# Altium PCB 6678_double_vpx.PcbDoc (part 1 of 3)
Units mil, origin at the board's own origin, x right, y up, seen from the top; angles counter-clockwise.
Board outline 6299.21 x 3937.01 mil, 6 copper layers (TOP, GND02, S03, S04, GND05, BOTTOM), stack 32.112 mil thick; 42 components, 156 nets, 734 pads, 1033 vias.
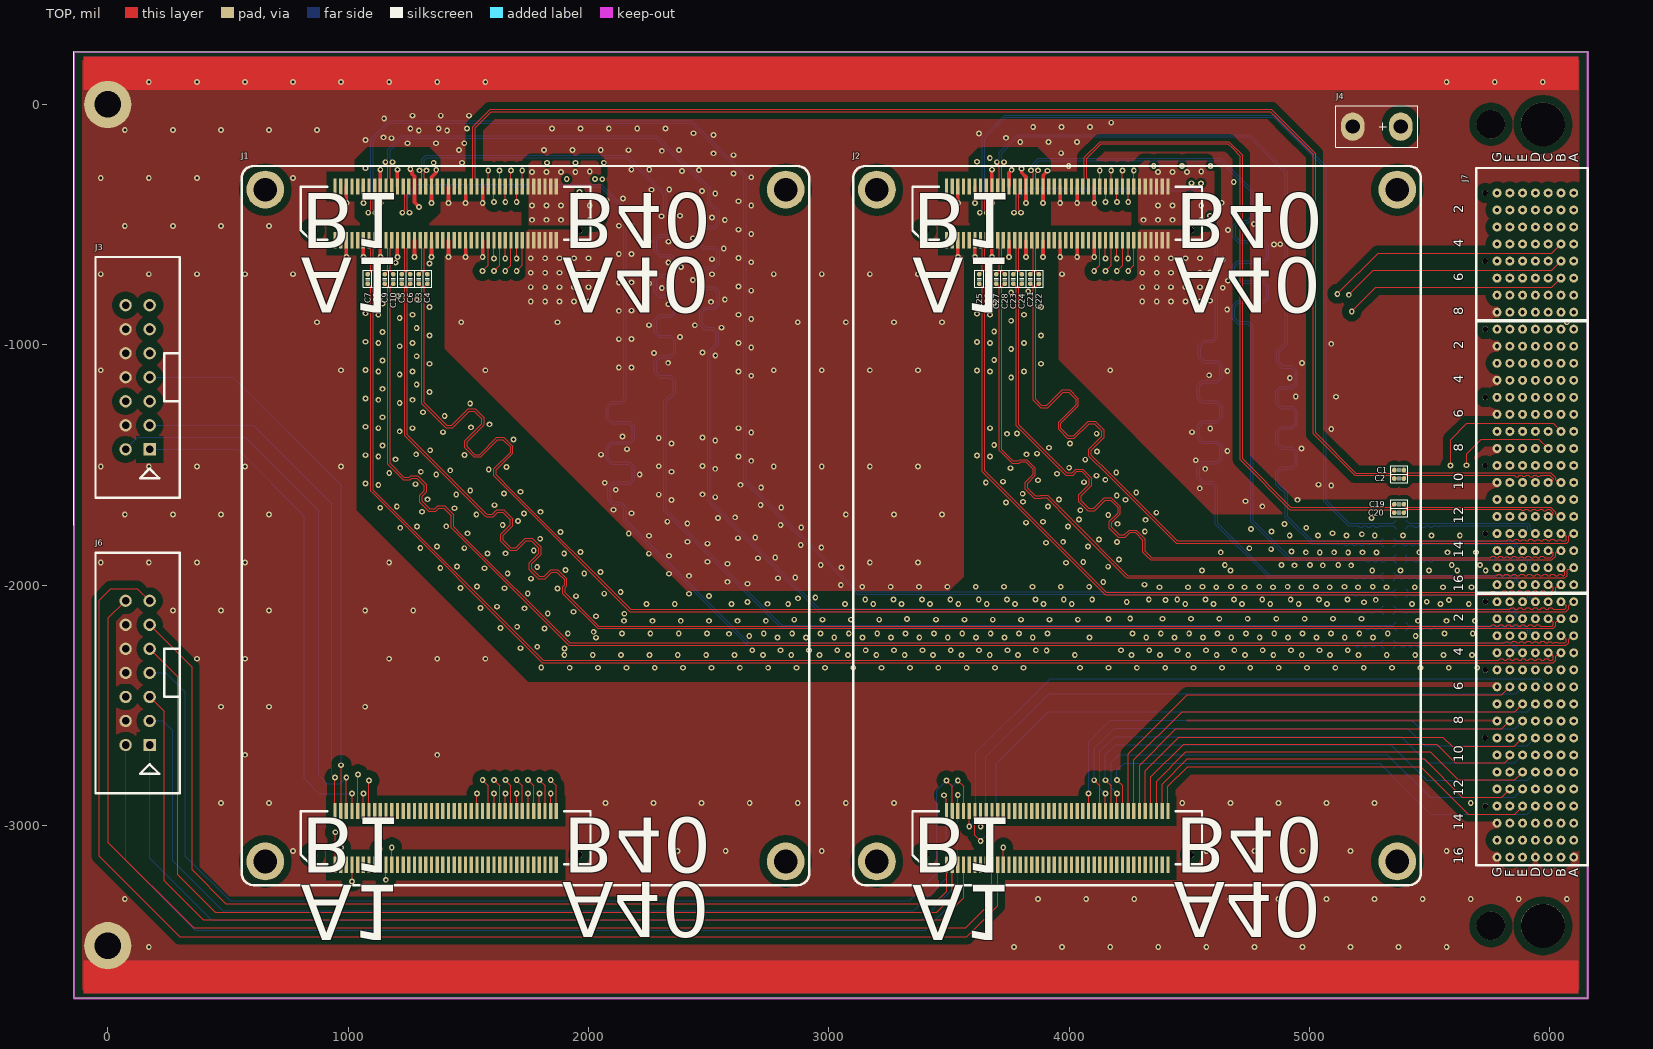
[diagram p0: TOP view]
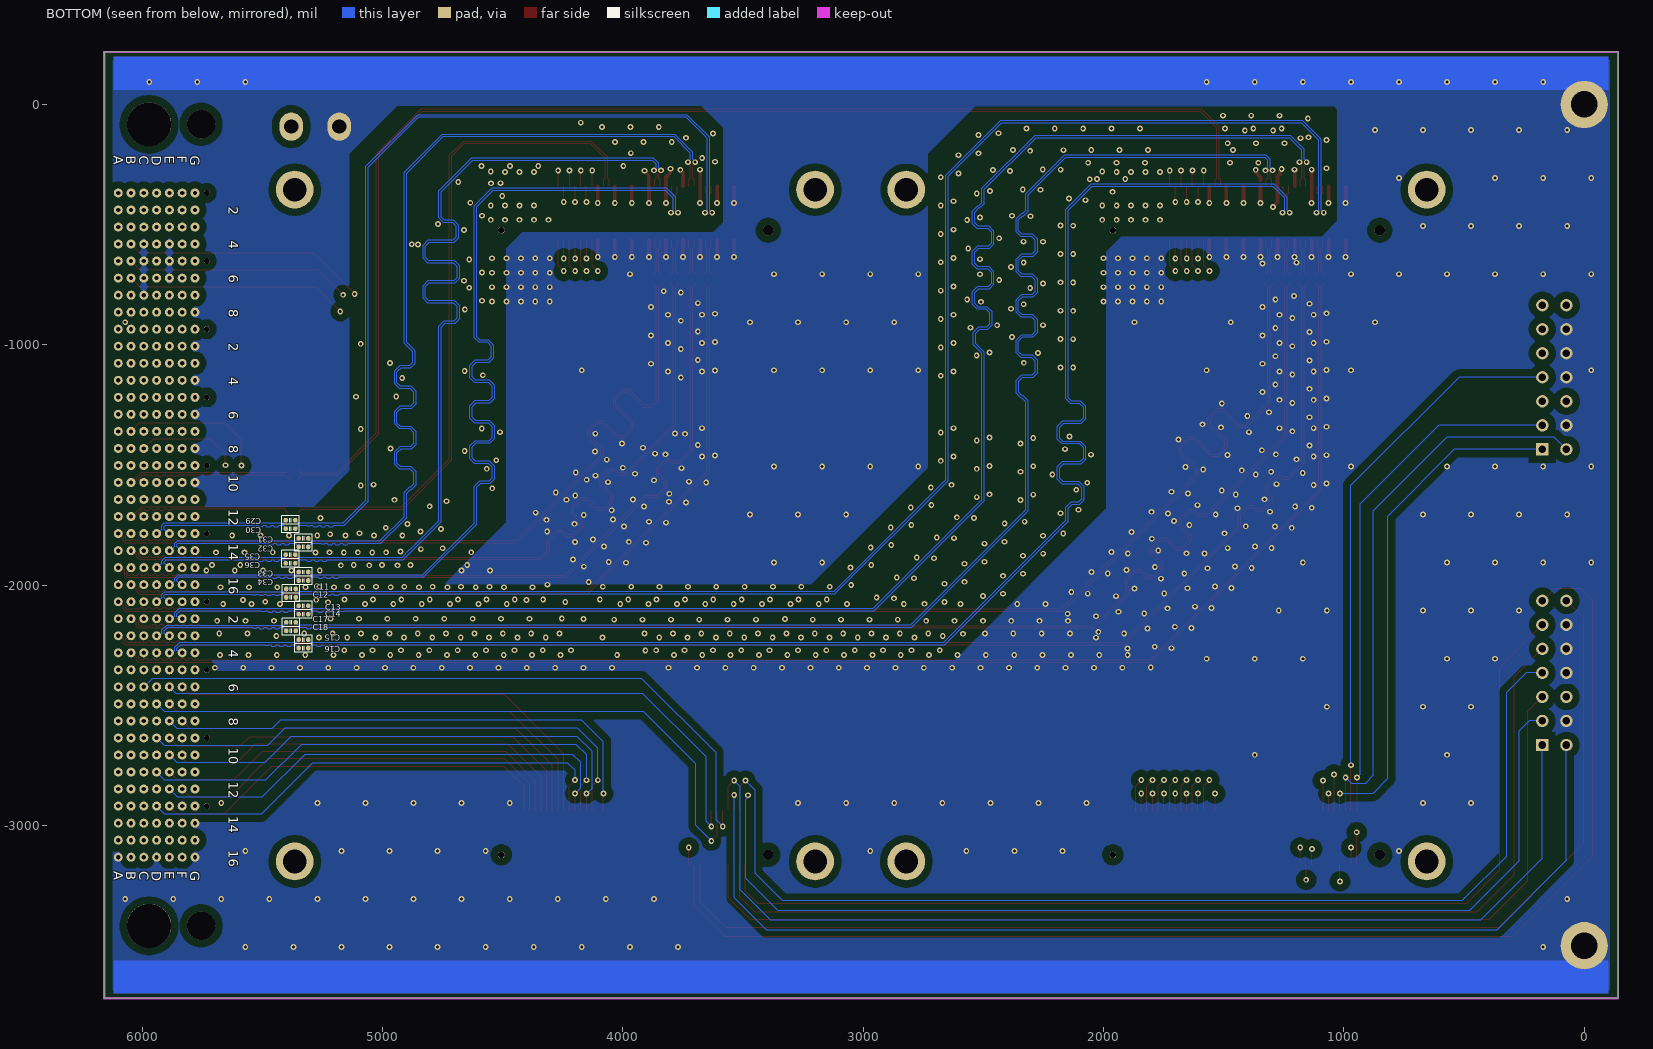
[diagram p1: BOTTOM view, seen from below]
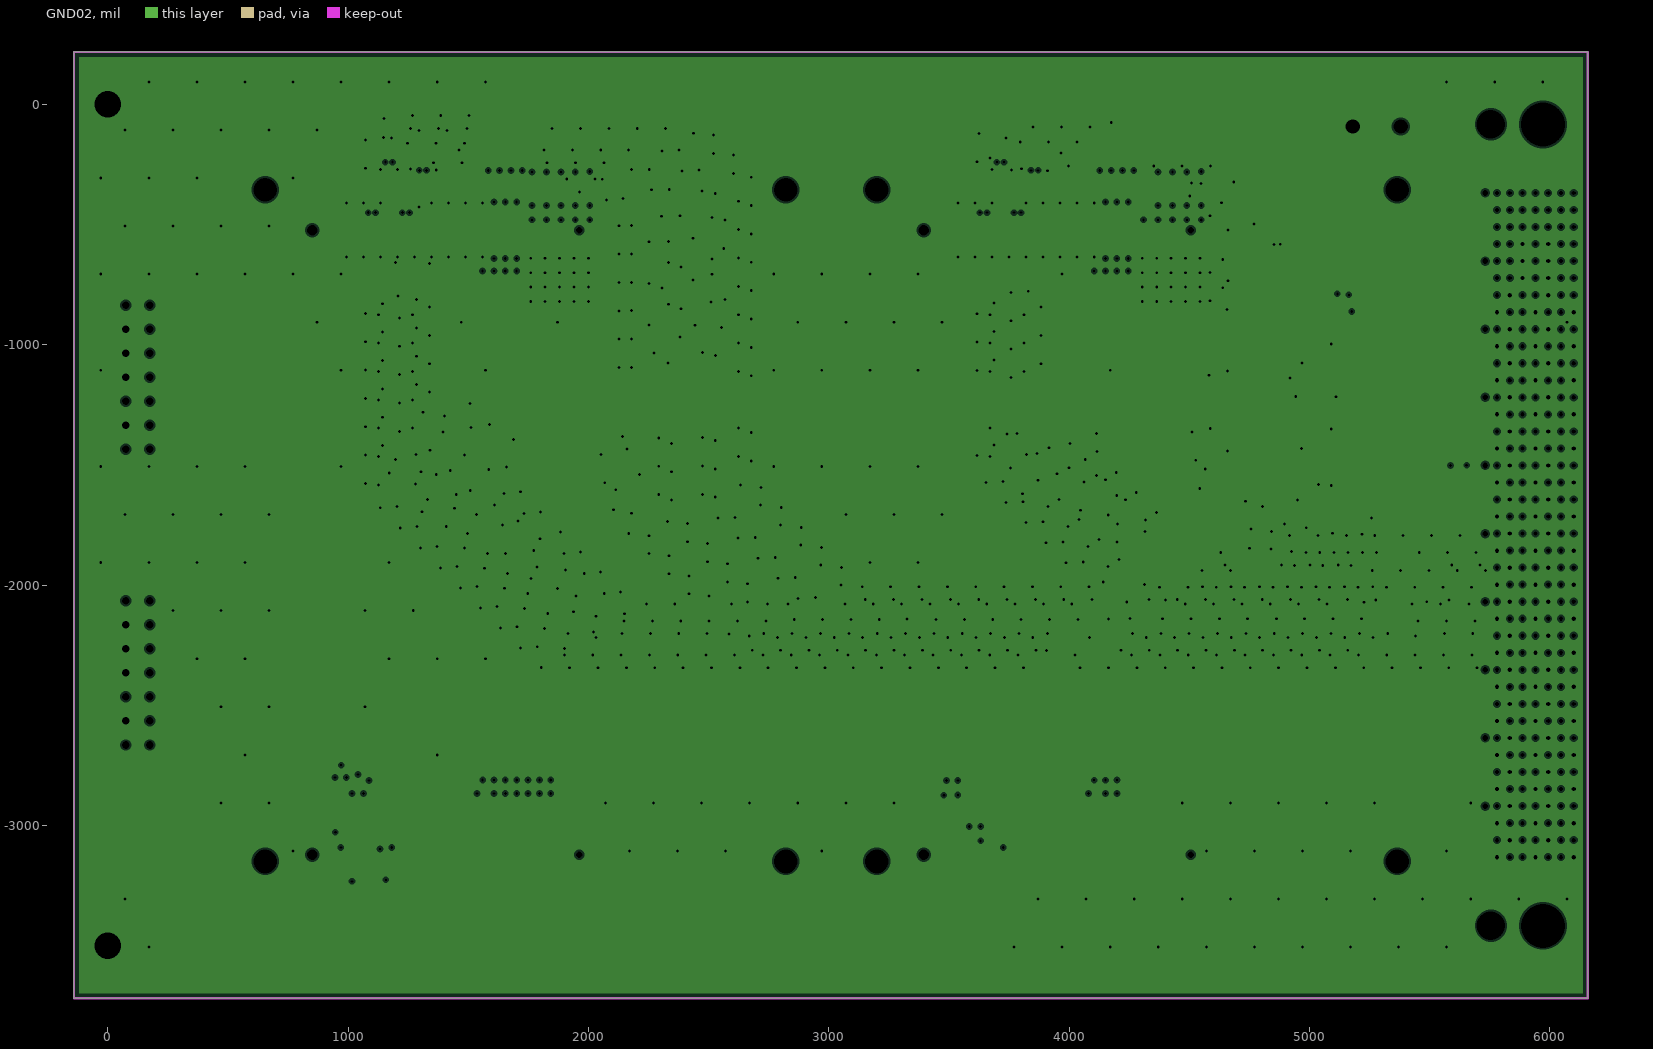
[diagram p2: GND02, clearances drawn from the general rule]
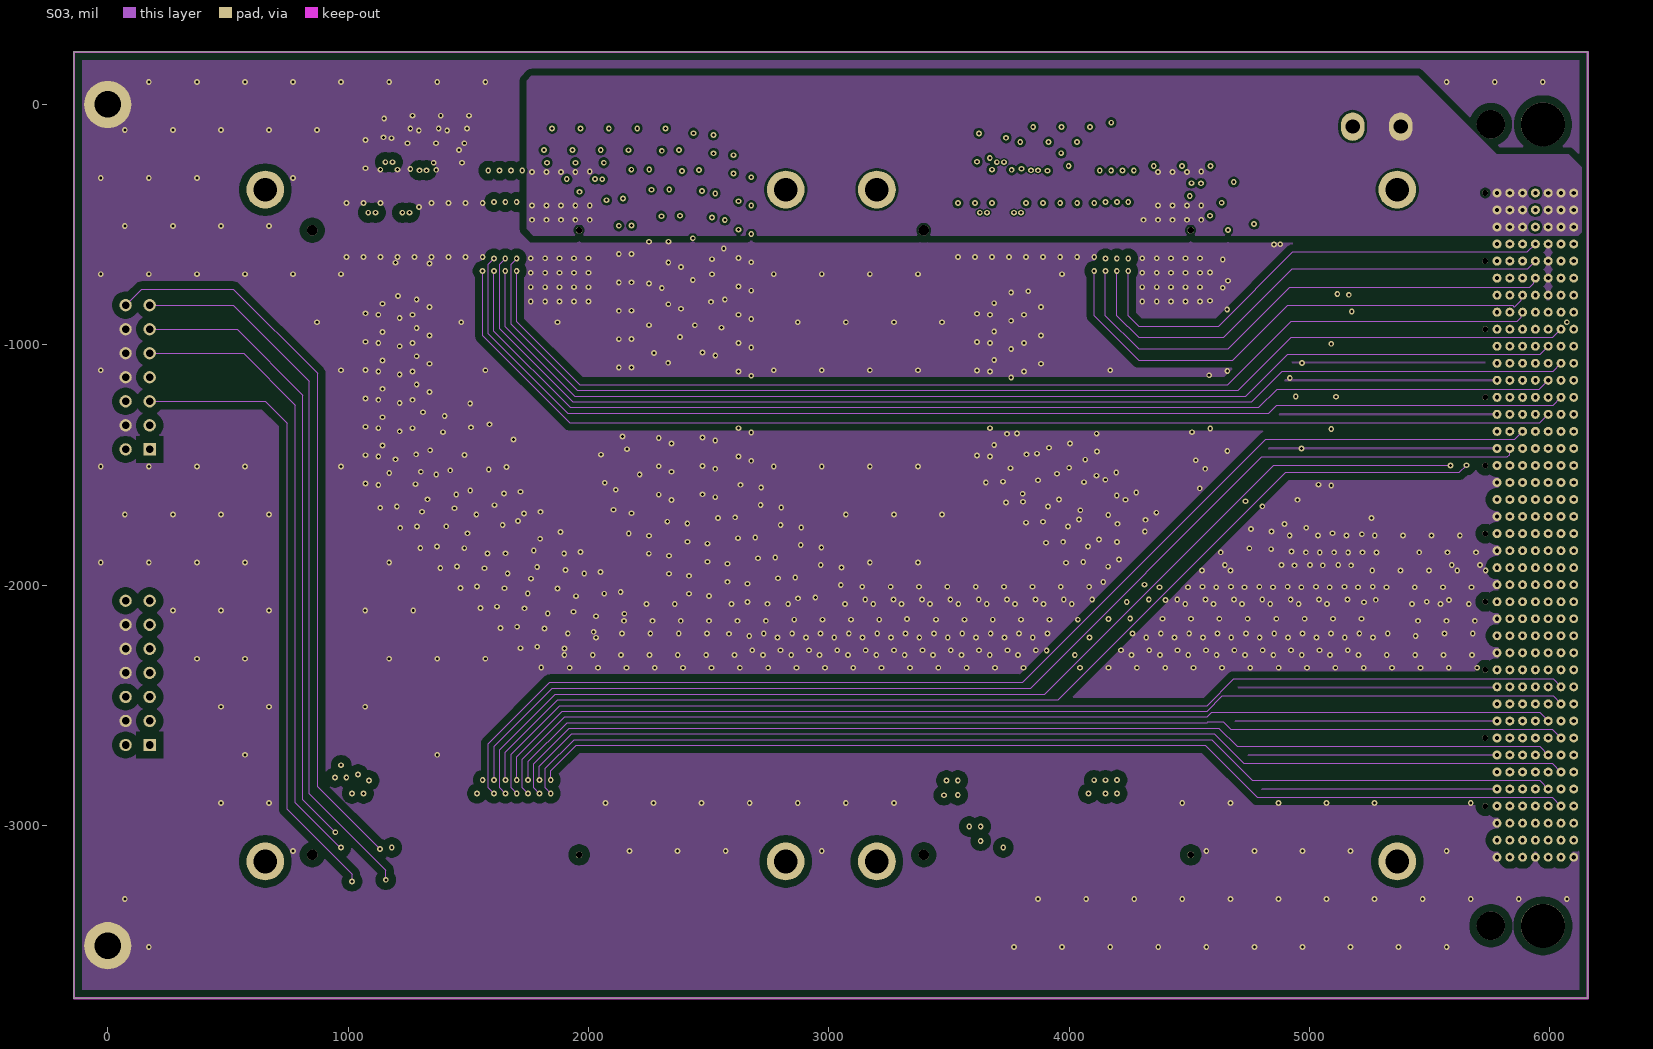
[diagram p3: S03]
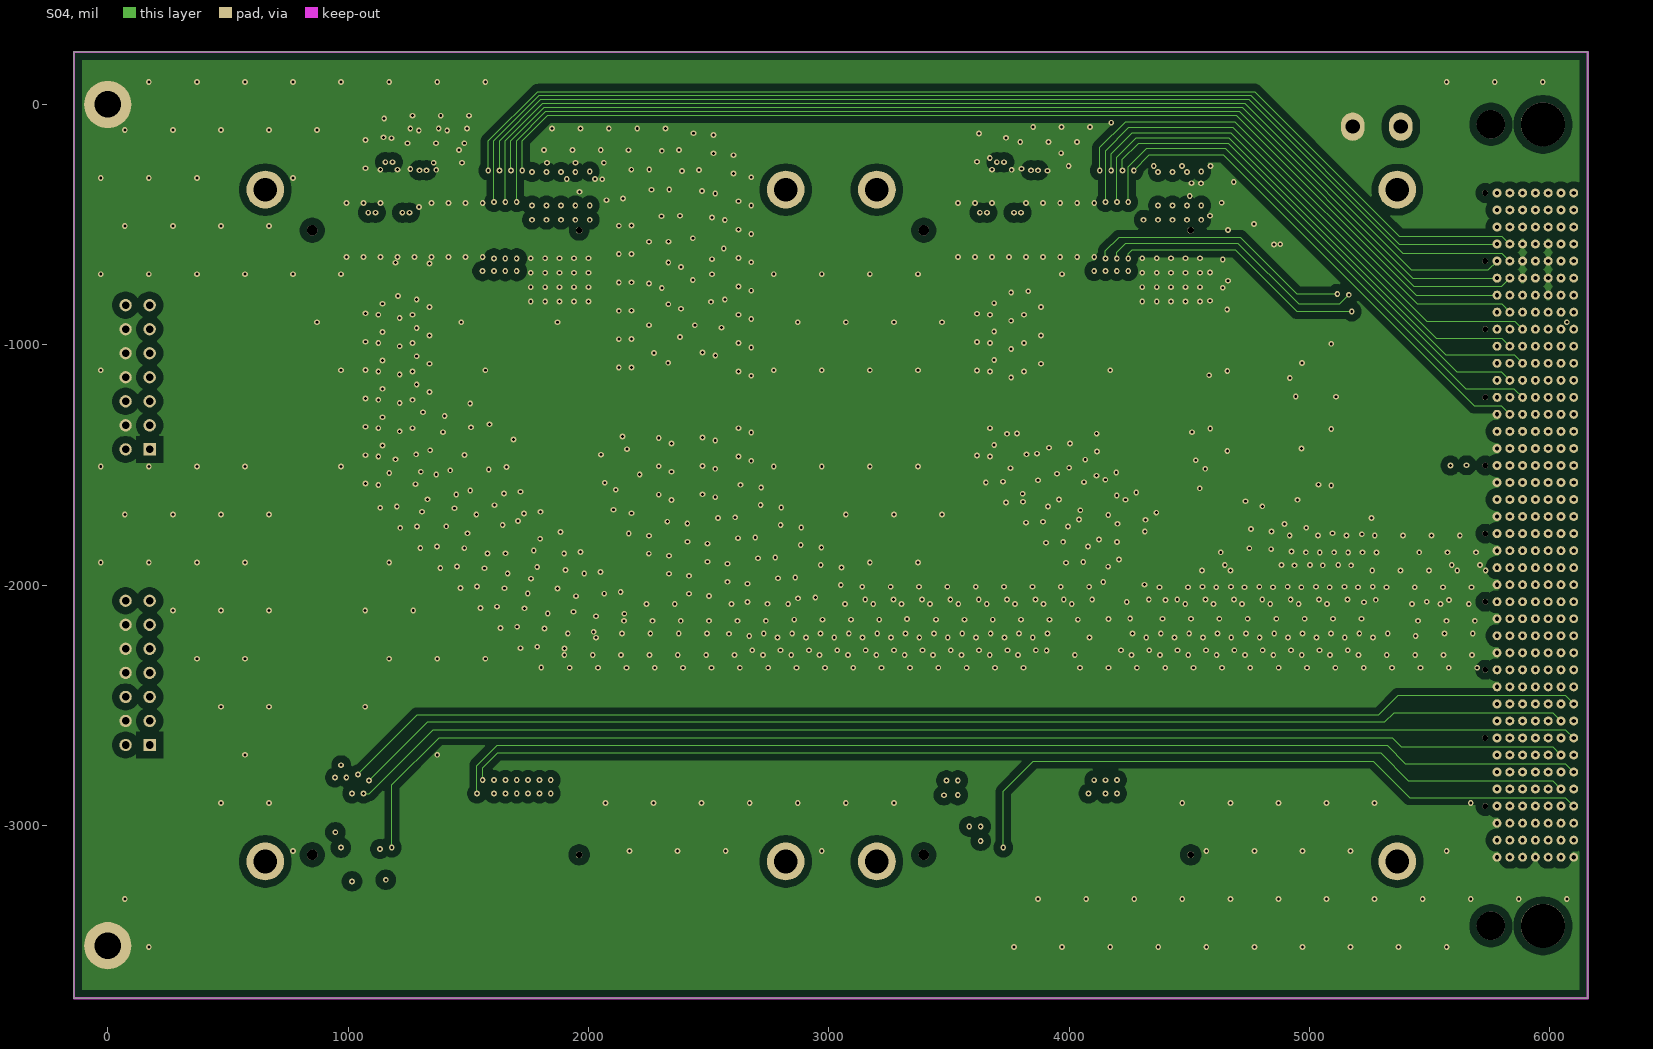
[diagram p4: S04]
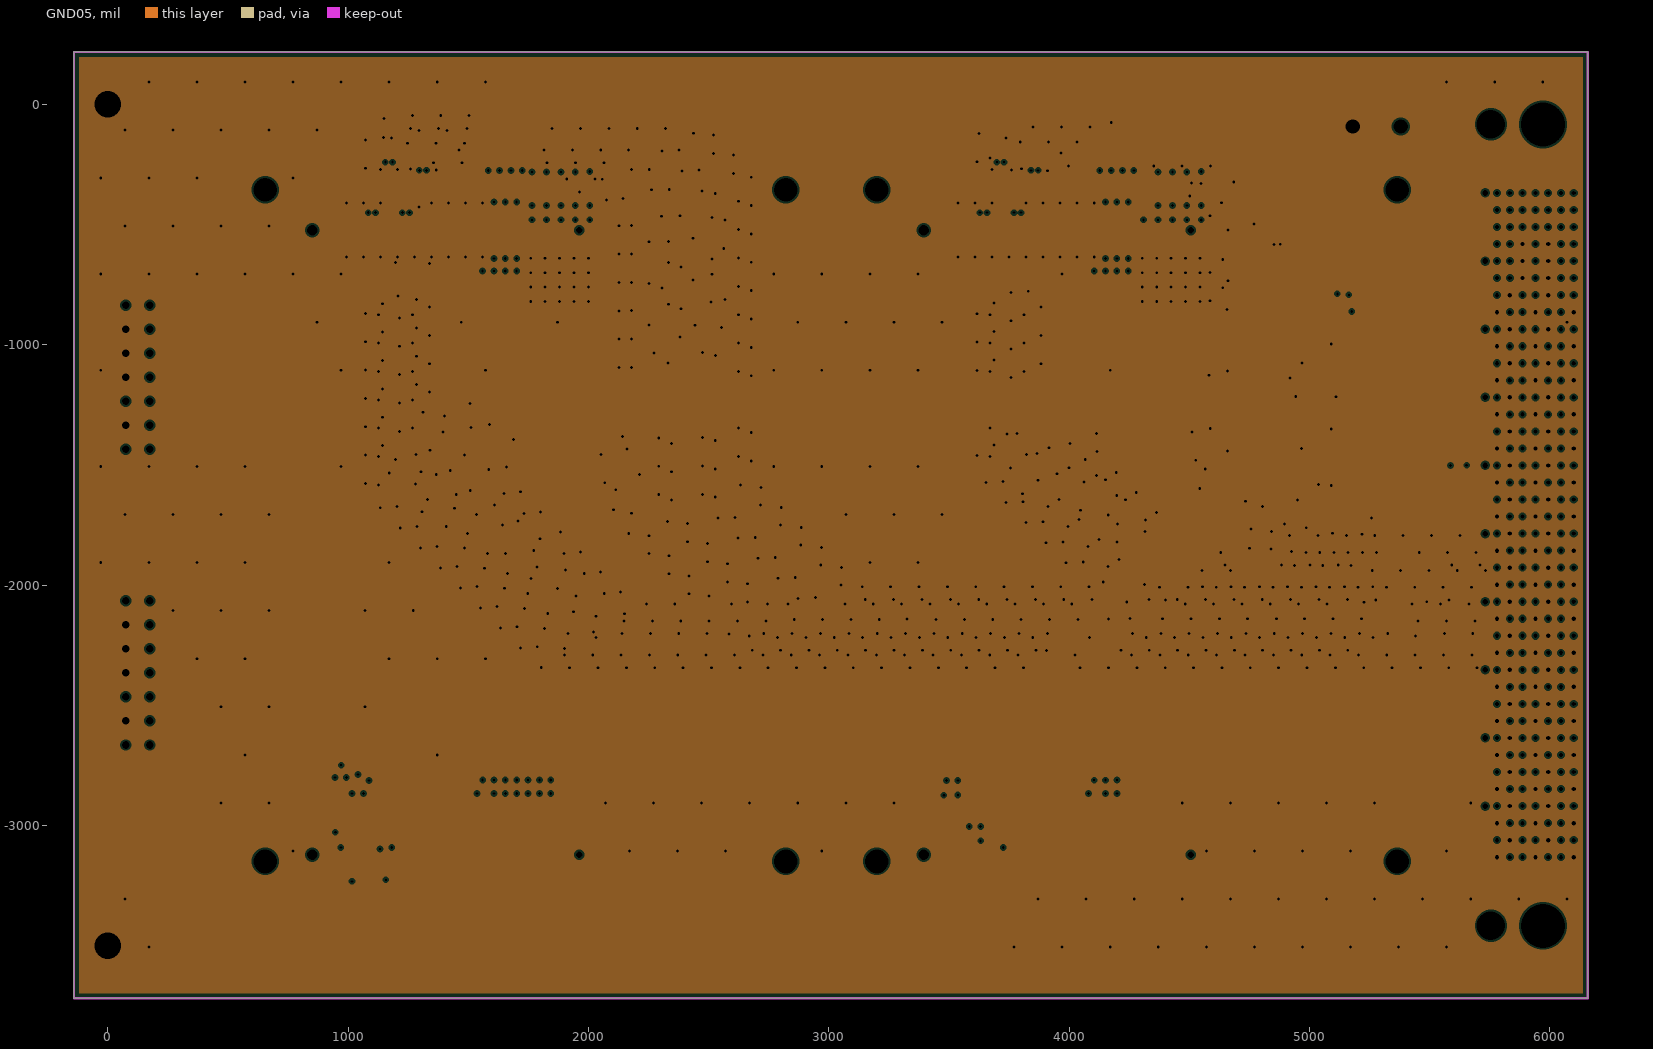
[diagram p5: GND05, clearances drawn from the general rule]

## Layer stack, top to bottom
Top Solder: solder mask 0.4, Solder Resist, Dk 3.5
TOP: signal copper 1.4
Dielectric 2: prepreg 2.8, PP-006, Dk 4.1
GND02: plane copper 1.378, net GND
Dielectric 4: prepreg 2.8, PP-006, Dk 4.1
S03: signal copper 1.378
Dielectric 1: dielectric 12.6, FR-4, Dk 4.8
S04: signal copper 1.378
Dielectric 5: prepreg 2.8, PP-006, Dk 4.1
GND05: plane copper 1.378, net GND
Dielectric 3: prepreg 2.8, PP-006, Dk 4.1
BOTTOM: signal copper 1.4
Bottom Solder: solder mask 0.4, Solder Resist, Dk 3.5

## Board outline
-140.56,-3718.5 6158.65,-3718.5 6158.65,218.5 -140.56,218.5

## Design rules (kind name [scope] priority, off if disabled: settings)
Clearance Clearance_GND [InNamedPolygon('GND_L')] p1: gap=30 ignorepadtopadclearanceinfootprint=TRUE
Clearance Clearance_room4 [WithinRoom('Room4') or WithinRoom('Room5')  or WithinRoom('DDR3')] p2: gap=3.9 ignorepadtopadclearanceinfootprint=TRUE
Clearance [WithinRoom('Room1')or WithinRoom('Room2')or WithinRoom('Room3') OR WithinRoom('Room6')] p3: gap=4 ignorepadtopadclearanceinfootprint=TRUE except(0: Arc-Hole Track-Hole SMDPad-Hole THPad-Hole Via-Hole Fill-Hole Poly-Hole Region-Hole Text-Hole)
Clearance Clearance_1 [InDifferentialPairClass('CF')] p4: gap=5 ignorepadtopadclearanceinfootprint=FALSE except(0: Arc-Hole Track-Hole SMDPad-Hole THPad-Hole Via-Hole Fill-Hole Poly-Hole Region-Hole Text-Hole; 6: Via-Via; 12: Arc-Fill Arc-Poly Arc-Region Track-Fill Track-Poly Track-Region SMDPad-Fill SMDPad-Poly SMDPad-Region)
Clearance Clearance_ALL [All] p5: gap=7 ignorepadtopadclearanceinfootprint=TRUE except(5: SMDPad-Fill SMDPad-Poly SMDPad-Region; 10: Arc-Hole Track-Hole SMDPad-Hole THPad-Fill THPad-Poly THPad-Region THPad-Hole Via-Fill Via-Poly Via-Region Via-Hole Fill-Fill Fill-Poly Fill-Region Fill-Hole Poly-Poly Poly-Region Poly-Hole Region-Region Region-Hole Text-Hole; 12: Arc-Fill Arc-Poly Arc-Region Track-Fill Track-Poly Track-Region)
ComponentClearance [All] p1: gap=0 collisioncheckmode=3 verticalgap=0 showdistances=FALSE
DiffPairsRouting [InDifferentialPairClass('CF')] p1: maxlimit=6 minlimit=6 mostfreqgap=6 toplayer_minwidth=4 toplayer_maxwidth=4 toplayer_prefwidth=4 midlayer1_minwidth=4 midlayer1_maxwidth=4 midlayer1_prefwidth=4 midlayer2_minwidth=4 midlayer2_maxwidth=4 midlayer2_prefwidth=4 bottomlayer_minwidth=4 bottomlayer_maxwidth=4 bottomlayer_prefwidth=4 maxuncoupledlength=1500
FanoutControl [InComponent('GP1') OR InComponent('J9')] p1: bgadir=Out bgaviamode=Centered fanoutstyle=BGA fanoutdirection=Alternating viagrid=1
FanoutControl Fanout_BGA [InComponent('U1')] p2: bgadir=Out bgaviamode=Centered fanoutstyle=BGA fanoutdirection=Alternating viagrid=1 // Fanout_BGA (Default Rule)
FanoutControl Fanout_LCC [IsLCC] p3: bgadir=Out bgaviamode=Centered fanoutstyle=Auto fanoutdirection=Alternating viagrid=1 // Fanout_LCC (Default Rule)
FanoutControl Fanout_SOIC [IsSOIC] p4: bgadir=Out bgaviamode=Centered fanoutstyle=Auto fanoutdirection=Alternating viagrid=1 // Fanout_SOIC (Default Rule)
FanoutControl Fanout_Small [(CompPinCount < 5)] p5: bgadir=Out bgaviamode=Centered fanoutstyle=Auto fanoutdirection=OutThenIn viagrid=1 // Fanout_Small (Default Rule)
FanoutControl Fanout_Default [All] p6: bgadir=Out bgaviamode=Centered fanoutstyle=Auto fanoutdirection=Alternating viagrid=1 // Fanout_Default (Default Rule)
HoleSize [All] p1: absolutevalues=TRUE maxlimit=1000 minlimit=1 maxpercent=80.000 minpercent=20.000
MatchedLengths DSP0_SRIO_RX [InNetClass('DSP0_SRIO_RX')] p1: tolerance=5 checknetsindiffpair=TRUE checkdiffpairvsdiffpair=FALSE checkxsignals=FALSE checkothers=FALSE
MatchedLengths DSP1_SRIO_RX [InNetClass('DSP1_SRIO_RX')] p2: tolerance=5 checknetsindiffpair=TRUE checkdiffpairvsdiffpair=FALSE checkxsignals=FALSE checkothers=FALSE
MatchedLengths BANK109_RX [InNetClass('F4_BANK109_RX')] p3: tolerance=5 checknetsindiffpair=TRUE checkdiffpairvsdiffpair=FALSE checkxsignals=FALSE checkothers=FALSE
MatchedLengths BANK110_RX [InNetClass('F4_BANK110_RX')] p4: tolerance=5 checknetsindiffpair=TRUE checkdiffpairvsdiffpair=FALSE checkxsignals=FALSE checkothers=FALSE
MatchedLengths BANK109_TX [InNetClass('F4_BANK109_TX')] p5: tolerance=5 checknetsindiffpair=TRUE checkdiffpairvsdiffpair=FALSE checkxsignals=FALSE checkothers=FALSE
MatchedLengths BANK110_TX [InNetClass('F4_BANK110_TX')] p6: tolerance=5 checknetsindiffpair=TRUE checkdiffpairvsdiffpair=FALSE checkxsignals=FALSE checkothers=FALSE
MatchedLengths CFD [InNetClass('CFD')] p7: tolerance=5 checknetsindiffpair=TRUE checkdiffpairvsdiffpair=FALSE checkxsignals=FALSE checkothers=FALSE
PlaneClearance [isvia] p1: clearance=8
PlaneClearance PlaneClearance_1 [All] p2: clearance=8
PlaneConnect [IsVia] p1: planeconnectstyle=Direct reliefexpansion=20 reliefentries=4 reliefconductorwidth=10 reliefairgap=10
PlaneConnect PlaneConnect_1 [All] p2: planeconnectstyle=Direct reliefexpansion=6 reliefentries=4 reliefconductorwidth=10 reliefairgap=8
PolygonConnect [All] p1: connectstyle=Direct reliefconductorwidth=15 reliefentries=4 polygonreliefangle="90 Angle" airgapwidth=10
RoutingCorners [All] p1: cornerstyle=45-Degree minsetback=0 maxsetback=100
RoutingTopology RoutingTopology_DDRAddressAndControls_2 [InNetClass('DDR_AddressAndControls_2')] p1: topology=Daisy_Simple
RoutingTopology RoutingTopology_DDRAddressAndControls_1 [InNetClass('DDR_AddressAndControls_1')] p2: topology=Daisy_Simple
RoutingTopology RoutingTopology_DDRAddressAndControls [InNetClass('DDR_AddressAndControls')] p3: topology=Daisy_Simple
RoutingTopology [All] p4: topology=Shortest
RoutingVias [All] p1: holewidth=12 width=24 viastyle="Through Hole" minholewidth=12 minwidth=24 maxholewidth=12 maxwidth=24
SilkToSilkClearance [All] p1: silktosilkclearance=0
SilkToSolderMaskClearance [IsPad] p1: minsilkscreentomaskgap=0 clearancetoexposedcopper=TRUE
SolderMaskExpansion SolderMaskExpansion_1 [IsVia] p1: expansion=2.5 istentingtop=FALSE
SolderMaskExpansion [All] p2: expansion=2.5 istentingtop=FALSE
Width Width_1 [InNetClass('POWER')  or InNetClass('AD0_POWER')  OR InNetClass('AD1_POWER')] p1: maxlimit=50 minlimit=10 preferedwidth=15
Width [All] p2: maxlimit=4.5 minlimit=4.5 preferedwidth=4.5 minimp=50.000000 maximp=50.000000 favimp=50.000000
16 further rules are at their usual default settings.

## Classes and differential pairs
net class CFD: CLK1IN_N CLK1IN_P CLK2IN_N CLK2IN_P DSP0_SRIO0_RX_N DSP0_SRIO0_RX_P DSP0_SRIO0_TX_N DSP0_SRIO0_TX_P DSP0_SRIO1_RX_N DSP0_SRIO1_RX_P DSP0_SRIO1_TX_N DSP0_SRIO1_TX_P DSP0_SRIO2_RX_N DSP0_SRIO2_RX_P DSP0_SRIO2_TX_N DSP0_SRIO2_TX_P DSP0_SRIO3_RX_N DSP0_SRIO3_RX_P DSP0_SRIO3_TX_N DSP0_SRIO3_TX_P DSP1_SRIO0_RX_N DSP1_SRIO0_RX_P DSP1_SRIO0_TX_N DSP1_SRIO0_TX_P DSP1_SRIO1_RX_N DSP1_SRIO1_RX_P DSP1_SRIO1_TX_N DSP1_SRIO1_TX_P DSP1_SRIO2_RX_N DSP1_SRIO2_RX_P DSP1_SRIO2_TX_N DSP1_SRIO2_TX_P DSP1_SRIO3_RX_N DSP1_SRIO3_RX_P DSP1_SRIO3_TX_N DSP1_SRIO3_TX_P F4_BANK109_RX0_N F4_BANK109_RX0_P F4_BANK109_RX1_N F4_BANK109_RX1_P F4_BANK109_RX2_N F4_BANK109_RX2_P F4_BANK109_RX3_N F4_BANK109_RX3_P F4_BANK109_TX0_N F4_BANK109_TX0_P F4_BANK109_TX1_N F4_BANK109_TX1_P F4_BANK109_TX2_N F4_BANK109_TX2_P F4_BANK109_TX3_N F4_BANK109_TX3_P F4_BANK110_RX0_N F4_BANK110_RX0_P F4_BANK110_RX1_N F4_BANK110_RX1_P F4_BANK110_RX2_N F4_BANK110_RX2_P F4_BANK110_RX3_N F4_BANK110_RX3_P F4_BANK110_TX0_N F4_BANK110_TX0_P F4_BANK110_TX1_N F4_BANK110_TX1_P F4_BANK110_TX2_N F4_BANK110_TX2_P F4_BANK110_TX3_N F4_BANK110_TX3_P OUT1CLK_N OUT1CLK_P OUT2CLK_N OUT2CLK_P
differential pair class CF: CLK1IN CLK2IN DSP0_SRIO0_RX DSP0_SRIO0_TX DSP0_SRIO1_RX DSP0_SRIO1_TX DSP0_SRIO2_RX DSP0_SRIO2_TX DSP0_SRIO3_RX DSP0_SRIO3_TX DSP1_SRIO0_RX DSP1_SRIO0_TX DSP1_SRIO1_RX DSP1_SRIO1_TX DSP1_SRIO2_RX DSP1_SRIO2_TX DSP1_SRIO3_RX DSP1_SRIO3_TX F4_BANK109_RX0 F4_BANK109_RX1 F4_BANK109_RX2 F4_BANK109_RX3 F4_BANK109_TX0 F4_BANK109_TX1 F4_BANK109_TX2 F4_BANK109_TX3 F4_BANK110_RX0 F4_BANK110_RX1 F4_BANK110_RX2 F4_BANK110_RX3 F4_BANK110_TX0 F4_BANK110_TX1 F4_BANK110_TX2 F4_BANK110_TX3 OUT1CLK OUT2CLK
net class CLK: CLK1IN_N CLK1IN_P CLK2IN_N CLK2IN_P
net class F44_TEMP: 6208_CLK 6208_CS 6208_EN 6208_IO0 6208_RST 6208_SDI 6208_SDO 62082_CLK2 62082_CS 62082_EN 62082_IO0 62082_RST 62082_SDI 62082_SDO BOOT2_MODE_00 BOOT2_MODE_01 BOOT2_MODE_02 BOOT2_MODE_03 BOOT2_MODE_04 BOOT2_MODE_05 BOOT2_MODE_06 BOOT2_MODE_07 BOOT2_MODE_08 BOOT2_MODE_09 BOOT2_MODE_10 BOOT2_MODE_11 BOOT2_MODE_12 BOOT2_MODE_13 BOOT_MODE_00 BOOT_MODE_01 BOOT_MODE_02 BOOT_MODE_03 BOOT_MODE_04 BOOT_MODE_05 BOOT_MODE_06 BOOT_MODE_07 BOOT_MODE_08 BOOT_MODE_09 BOOT_MODE_10 BOOT_MODE_11 BOOT_MODE_12 BOOT_MODE_13 CLK2_25M_SEL CLK2_ELF CLK2_PDN CLK2_SI_MODE0 CLK2_SI_MODE1 CLK_25M_SEL CLK_ELF CLK_PDN CLK_SI_MODE0 CLK_SI_MODE1 DSP0_PORZ DSP0_SYSYCLKOUT DSP0_UARTRXD DSP0_UARTTXD DSP1_PORZ DSP1_RSTn DSP1_SYSYCLKOUT DSP1_UARTRXD DSP1_UARTTXD DSP1_WRSTn
net class F4_BANK109_RX: F4_BANK109_RX0_N F4_BANK109_RX0_P F4_BANK109_RX1_N F4_BANK109_RX1_P F4_BANK109_RX2_N F4_BANK109_RX2_P F4_BANK109_RX3_N F4_BANK109_RX3_P
net class F4_BANK109_TX: F4_BANK109_TX0_N F4_BANK109_TX0_P F4_BANK109_TX1_N F4_BANK109_TX1_P F4_BANK109_TX2_N F4_BANK109_TX2_P F4_BANK109_TX3_N F4_BANK109_TX3_P
net class F4_BANK110_TX: F4_BANK110_TX0_N F4_BANK110_TX0_P F4_BANK110_TX1_N F4_BANK110_TX1_P F4_BANK110_TX2_N F4_BANK110_TX2_P F4_BANK110_TX3_N F4_BANK110_TX3_P
net class F4_BANK110_RX: F4_BANK110_RX0_N F4_BANK110_RX0_P F4_BANK110_RX1_N F4_BANK110_RX1_P F4_BANK110_RX2_N F4_BANK110_RX2_P F4_BANK110_RX3_N F4_BANK110_RX3_P
net class DSP1_LVTTL: 62082_SDO BOOT2_MODE_09
net class DSP1_SRIO_TX: DSP1_SRIO0_TX_N DSP1_SRIO0_TX_P DSP1_SRIO1_TX_N DSP1_SRIO1_TX_P DSP1_SRIO2_TX_N DSP1_SRIO2_TX_P DSP1_SRIO3_TX_N DSP1_SRIO3_TX_P
net class DSP1_SRIO_RX: DSP1_SRIO0_RX_N DSP1_SRIO0_RX_P DSP1_SRIO1_RX_N DSP1_SRIO1_RX_P DSP1_SRIO2_RX_N DSP1_SRIO2_RX_P DSP1_SRIO3_RX_N DSP1_SRIO3_RX_P
net class DSP0_SRIO_TX: DSP0_SRIO0_TX_N DSP0_SRIO0_TX_P DSP0_SRIO1_TX_N DSP0_SRIO1_TX_P DSP0_SRIO2_TX_N DSP0_SRIO2_TX_P DSP0_SRIO3_TX_N DSP0_SRIO3_TX_P
net class DSP0_SRIO_RX: DSP0_SRIO0_RX_N DSP0_SRIO0_RX_P DSP0_SRIO1_RX_N DSP0_SRIO1_RX_P DSP0_SRIO2_RX_N DSP0_SRIO2_RX_P DSP0_SRIO3_RX_N DSP0_SRIO3_RX_P
net class POWER: GND VCO_12V
differential pair OUT2CLK: +OUT2CLK_P -OUT2CLK_N
differential pair OUT1CLK: +OUT1CLK_P -OUT1CLK_N
differential pair DSP1_SRIO3_TX: +DSP1_SRIO3_TX_P -DSP1_SRIO3_TX_N
differential pair DSP1_SRIO3_RX: +DSP1_SRIO3_RX_P -DSP1_SRIO3_RX_N
differential pair DSP1_SRIO2_TX: +DSP1_SRIO2_TX_P -DSP1_SRIO2_TX_N
differential pair DSP1_SRIO2_RX: +DSP1_SRIO2_RX_P -DSP1_SRIO2_RX_N
differential pair DSP1_SRIO1_TX: +DSP1_SRIO1_TX_P -DSP1_SRIO1_TX_N
differential pair DSP1_SRIO1_RX: +DSP1_SRIO1_RX_P -DSP1_SRIO1_RX_N
differential pair DSP1_SRIO0_TX: +DSP1_SRIO0_TX_P -DSP1_SRIO0_TX_N
differential pair DSP1_SRIO0_RX: +DSP1_SRIO0_RX_P -DSP1_SRIO0_RX_N
differential pair DSP0_SRIO3_TX: +DSP0_SRIO3_TX_P -DSP0_SRIO3_TX_N
differential pair DSP0_SRIO3_RX: +DSP0_SRIO3_RX_P -DSP0_SRIO3_RX_N
differential pair DSP0_SRIO2_TX: +DSP0_SRIO2_TX_P -DSP0_SRIO2_TX_N
differential pair DSP0_SRIO2_RX: +DSP0_SRIO2_RX_P -DSP0_SRIO2_RX_N
differential pair DSP0_SRIO1_TX: +DSP0_SRIO1_TX_P -DSP0_SRIO1_TX_N
differential pair DSP0_SRIO1_RX: +DSP0_SRIO1_RX_P -DSP0_SRIO1_RX_N
differential pair DSP0_SRIO0_TX: +DSP0_SRIO0_TX_P -DSP0_SRIO0_TX_N
differential pair DSP0_SRIO0_RX: +DSP0_SRIO0_RX_P -DSP0_SRIO0_RX_N
differential pair F4_BANK110_TX3: +F4_BANK110_TX3_P -F4_BANK110_TX3_N
differential pair F4_BANK110_TX2: +F4_BANK110_TX2_P -F4_BANK110_TX2_N
differential pair F4_BANK110_TX1: +F4_BANK110_TX1_P -F4_BANK110_TX1_N
differential pair F4_BANK110_TX0: +F4_BANK110_TX0_P -F4_BANK110_TX0_N
differential pair F4_BANK110_RX3: +F4_BANK110_RX3_P -F4_BANK110_RX3_N
differential pair F4_BANK110_RX2: +F4_BANK110_RX2_P -F4_BANK110_RX2_N
differential pair F4_BANK110_RX1: +F4_BANK110_RX1_P -F4_BANK110_RX1_N
differential pair F4_BANK110_RX0: +F4_BANK110_RX0_P -F4_BANK110_RX0_N
differential pair F4_BANK109_TX3: +F4_BANK109_TX3_P -F4_BANK109_TX3_N
differential pair F4_BANK109_TX2: +F4_BANK109_TX2_P -F4_BANK109_TX2_N
differential pair F4_BANK109_TX1: +F4_BANK109_TX1_P -F4_BANK109_TX1_N
differential pair F4_BANK109_TX0: +F4_BANK109_TX0_P -F4_BANK109_TX0_N
differential pair F4_BANK109_RX3: +F4_BANK109_RX3_P -F4_BANK109_RX3_N
differential pair F4_BANK109_RX2: +F4_BANK109_RX2_P -F4_BANK109_RX2_N
differential pair F4_BANK109_RX1: +F4_BANK109_RX1_P -F4_BANK109_RX1_N
differential pair F4_BANK109_RX0: +F4_BANK109_RX0_P -F4_BANK109_RX0_N
differential pair CLK2IN: +CLK2IN_P -CLK2IN_N
differential pair CLK1IN: +CLK1IN_P -CLK1IN_N

## Components (designator, comment, footprint, x,y, rotation, side; value= is the part's Value field where it differs from the comment)
C1 "0.1uF/50V" C0402 5373,-1521 r180 top
C2 "0.1uF/50V" C0402 5373,-1556.43 r180 top
C3 "0.1uF/50V" C0402 1294.2,-726 r90 top
C4 "0.1uF/50V" C0402 1329.64,-726 r90 top
C5 "0.1uF/50V" C0402 1223.34,-726 r90 top
C6 "0.1uF/50V" C0402 1258.77,-726 r90 top
C7 "0.1uF/50V" C0402 1081.61,-726 r90 top
C8 "0.1uF/50V" C0402 1117.04,-726 r90 top
C9 "0.1uF/50V" C0402 1152.47,-726 r90 top
C10 "0.1uF/50V" C0402 1187.91,-726 r90 top
C11 "0.1uF/50V" C0402 5381,-2015.57 r180 bottom
C12 "0.1uF/50V" C0402 5381,-2051 r180 bottom
C13 "0.1uF/50V" C0402 5329,-2085.55 r180 bottom
C14 "0.1uF/50V" C0402 5329,-2120.98 r180 bottom
C15 "0.1uF/50V" C0402 5329,-2226.57 r180 bottom
C16 "0.1uF/50V" C0402 5329,-2262 r180 bottom
C17 "0.1uF/50V" C0402 5381,-2154.57 r180 bottom
C18 "0.1uF/50V" C0402 5381,-2190 r180 bottom
C19 "0.1uF/50V" C0402 5373,-1663 r180 top
C20 "0.1uF/50V" C0402 5373,-1698.43 r180 top
C21 "0.1uF/50V" C0402 3838.73,-726 r90 top
C22 "0.1uF/50V" C0402 3874.17,-726 r90 top
C23 "0.1uF/50V" C0402 3767.87,-726 r90 top
C24 "0.1uF/50V" C0402 3803.3,-726 r90 top
C25 "0.1uF/50V" C0402 3626.13,-726 r90 top
C26 "0.1uF/50V" C0402 3661.57,-726 r90 top
C27 "0.1uF/50V" C0402 3697,-726 r90 top
C28 "0.1uF/50V" C0402 3732.43,-726 r90 top
C29 "0.1uF/50V" C0402 5383,-1729.57 r180 bottom
C30 "0.1uF/50V" C0402 5383,-1765 r180 bottom
C31 "0.1uF/50V" C0402 5329,-1805.28 r180 bottom
C32 "0.1uF/50V" C0402 5329,-1840.72 r180 bottom
C33 "0.1uF/50V" C0402 5329,-1945.28 r180 bottom
C34 "0.1uF/50V" C0402 5329,-1980.72 r180 bottom
C35 "0.1uF/50V" C0402 5383,-1873.28 r180 bottom
C36 "0.1uF/50V" C0402 5383,-1908.72 r180 bottom
J1 "6678" 6678_CORE 655.51,-3149.65 r270 top locked
J2 "6678" 6678_CORE 3200.04,-3149.65 r270 top locked
J3 "JTAG14" JTAG14_2.54 174.4,-1435.04 r180 top locked
J4 "CON2" POWER-M3-5.08 5380,-92 r180 top
J6 "JTAG14" JTAG14_2.54 174.4,-2664.96 r180 top locked
J7 "VPX4_H" VPX_3U 6158.65,-1750 r90 top

## Footprints (in the part's own frame and the unit in brackets; to place one, negate y for a bottom-side part, rotate by r counter-clockwise, add the part's x,y. Pads: shape width x height; smd on the part's side, far side on the other; paste and mask are expansions set on the pad)
6678_CORE [mm]
  round 4 hole 2.5: 0(-71,55) 0(-71,0) 0(0,55) 0(0,0)
  rect 1.7x0.35 smd: A1_1(-65.65,7.365) A1_2(-65.65,7.965) A1_3(-65.65,8.565) A1_4(-65.65,9.165) A1_5(-65.65,9.765) A1_6(-65.65,10.365) A1_7(-65.65,10.965) A1_8(-65.65,11.565) A1_9(-65.65,12.165) A1_10(-65.65,12.765) A1_11(-65.65,13.365) A1_12(-65.65,13.965) A1_13(-65.65,14.565) A1_14(-65.65,15.165) A1_15(-65.65,15.765) A1_16(-65.65,16.365) A1_17(-65.65,16.965) A1_18(-65.65,17.565) A1_19(-65.65,18.165) A1_20(-65.65,18.765) A1_21(-65.65,19.365) A1_22(-65.65,19.965) A1_23(-65.65,20.565) A1_24(-65.65,21.165) A1_25(-65.65,21.765) A1_26(-65.65,22.365) A1_27(-65.65,22.965) A1_28(-65.65,23.565) A1_29(-65.65,24.165) A1_30(-65.65,24.765) A1_31(-65.65,25.365) A1_32(-65.65,25.965) A1_33(-65.65,26.565) A1_34(-65.65,27.165) A1_35(-65.65,27.765) A1_36(-65.65,28.365) A1_37(-65.65,28.965) A1_38(-65.65,29.565) A1_39(-65.65,30.165) A1_40(-65.65,30.765) A2_1(0.35,7.365) A2_2(0.35,7.965) A2_3(0.35,8.565) A2_4(0.35,9.165) A2_5(0.35,9.765) A2_6(0.35,10.365) A2_7(0.35,10.965) A2_8(0.35,11.565) A2_9(0.35,12.165) A2_10(0.35,12.765) A2_11(0.35,13.365) A2_12(0.35,13.965) A2_13(0.35,14.565) A2_14(0.35,15.165) A2_15(0.35,15.765) A2_16(0.35,16.365) A2_17(0.35,16.965) A2_18(0.35,17.565) A2_19(0.35,18.165) A2_20(0.35,18.765) A2_21(0.35,19.365) A2_22(0.35,19.965) A2_23(0.35,20.565) A2_24(0.35,21.165) A2_25(0.35,21.765) A2_26(0.35,22.365) A2_27(0.35,22.965) A2_28(0.35,23.565) A2_29(0.35,24.165) A2_30(0.35,24.765) A2_31(0.35,25.365) A2_32(0.35,25.965) A2_33(0.35,26.565) A2_34(0.35,27.165) A2_35(0.35,27.765) A2_36(0.35,28.365) A2_37(0.35,28.965) A2_38(0.35,29.565) A2_39(0.35,30.165) A2_40(0.35,30.765) B1_1(-71.35,7.365) B1_2(-71.35,7.965) B1_3(-71.35,8.565) B1_4(-71.35,9.165) B1_5(-71.35,9.765) B1_6(-71.35,10.365) B1_7(-71.35,10.965) B1_8(-71.35,11.565) B1_9(-71.35,12.165) B1_10(-71.35,12.765) B1_11(-71.35,13.365) B1_12(-71.35,13.965) B1_13(-71.35,14.565) B1_14(-71.35,15.165) B1_15(-71.35,15.765) B1_16(-71.35,16.365) B1_17(-71.35,16.965) B1_18(-71.35,17.565) B1_19(-71.35,18.165) B1_20(-71.35,18.765) B1_21(-71.35,19.365) B1_22(-71.35,19.965) B1_23(-71.35,20.565) B1_24(-71.35,21.165) B1_25(-71.35,21.765) B1_26(-71.35,22.365) B1_27(-71.35,22.965) B1_28(-71.35,23.565) B1_29(-71.35,24.165) B1_30(-71.35,24.765) B1_31(-71.35,25.365) B1_32(-71.35,25.965) B1_33(-71.35,26.565) B1_34(-71.35,27.165) B1_35(-71.35,27.765) B1_36(-71.35,28.365) B1_37(-71.35,28.965) B1_38(-71.35,29.565) B1_39(-71.35,30.165) B1_40(-71.35,30.765) B2_1(-5.35,7.365) B2_2(-5.35,7.965) B2_3(-5.35,8.565) B2_4(-5.35,9.165) B2_5(-5.35,9.765) B2_6(-5.35,10.365) B2_7(-5.35,10.965) B2_8(-5.35,11.565) B2_9(-5.35,12.165) B2_10(-5.35,12.765) B2_11(-5.35,13.365) B2_12(-5.35,13.965) B2_13(-5.35,14.565) B2_14(-5.35,15.165) B2_15(-5.35,15.765) B2_16(-5.35,16.365) B2_17(-5.35,16.965) B2_18(-5.35,17.565) B2_19(-5.35,18.165) B2_20(-5.35,18.765) B2_21(-5.35,19.365) B2_22(-5.35,19.965) B2_23(-5.35,20.565) B2_24(-5.35,21.165) B2_25(-5.35,21.765) B2_26(-5.35,22.365) B2_27(-5.35,22.965) B2_28(-5.35,23.565) B2_29(-5.35,24.165) B2_30(-5.35,24.765) B2_31(-5.35,25.365) B2_32(-5.35,25.965) B2_33(-5.35,26.565) B2_34(-5.35,27.165) B2_35(-5.35,27.765) B2_36(-5.35,28.365) B2_37(-5.35,28.965) B2_38(-5.35,29.565) B2_39(-5.35,30.165) B2_40(-5.35,30.765)
  round 1.1 hole 1.1: ZH-C1(-66.7,4.965) ZH-C1(-0.7,4.965)
  round 0.7 hole 0.7: ZH-C2(-66.7,33.165) ZH-C2(-0.7,33.165)
  silkscreen extent -73.5,-2.5 2.5,57.5
C0402 [mil]
  round 20 smd: 1(-19.69,0) 2(19.69,0)
  silkscreen extent -35,-18 35,18
JTAG14_2.54 [mm]
  rect 1.3x1.3 hole 0.8: 1(0,0)
  round 1.3 hole 0.8: 2(2.54,0) 3(0,-2.54) 4(2.54,-2.54) 5(0,-5.08) 6(2.54,-5.08) 7(0,-7.62) 8(2.54,-7.62) 9(0,-10.16) 10(2.54,-10.16) 11(0,-12.7) 12(2.54,-12.7) 13(0,-15.24) 14(2.54,-15.24)
  silkscreen extent -3.18,-20.33 5.72,5.1
POWER-M3-5.08 [mm]
  oval 2.5x3 hole 1.5: 1(0,0) 2(5.08,0)
  silkscreen extent -1.8,-2.2 6.88,2.2
VPX_3U [mm]
  round 0.95 hole 0.45: P0_A1(35.1,1.5) P0_A2(33.3,1.5) P0_A3(31.5,1.5) P0_A4(29.7,1.5) P0_A5(27.9,1.5) P0_A6(26.1,1.5) P0_A7(24.3,1.5) P0_A8(22.5,1.5) P0_B1(35.1,2.85) P0_B2(33.3,2.85) P0_B3(31.5,2.85) P0_B4(29.7,2.85) P0_B5(27.9,2.85) P0_B6(26.1,2.85) P0_B7(24.3,2.85) P0_B8(22.5,2.85) P0_C1(35.1,4.2) P0_C2(33.3,4.2) P0_C3(31.5,4.2) P0_C4(29.7,4.2) P0_C5(27.9,4.2) P0_C6(26.1,4.2) P0_C7(24.3,4.2) P0_C8(22.5,4.2) P0_D1(35.1,5.55) P0_D2(33.3,5.55) P0_D3(31.5,5.55) P0_D4(29.7,5.55) P0_D5(27.9,5.55) P0_D6(26.1,5.55) P0_D7(24.3,5.55) P0_D8(22.5,5.55) P0_E1(35.1,6.9) P0_E2(33.3,6.9) P0_E3(31.5,6.9) P0_E4(29.7,6.9) P0_E5(27.9,6.9) P0_E6(26.1,6.9) P0_E7(24.3,6.9) P0_E8(22.5,6.9) P0_F1(35.1,8.25) P0_F2(33.3,8.25) P0_F3(31.5,8.25) P0_F4(29.7,8.25) P0_F5(27.9,8.25) P0_F6(26.1,8.25) P0_F7(24.3,8.25) P0_F8(22.5,8.25) P0_G1(35.1,9.6) P0_G2(33.3,9.6) P0_G3(31.5,9.6) P0_G4(29.7,9.6) P0_G5(27.9,9.6) P0_G6(26.1,9.6) P0_G7(24.3,9.6) P0_G8(22.5,9.6) P1_A1(20.7,1.5) P1_A2(18.9,1.5) P1_A3(17.1,1.5) P1_A4(15.3,1.5) P1_A5(13.5,1.5) P1_A6(11.7,1.5) P1_A7(9.9,1.5) P1_A8(8.1,1.5) P1_A9(6.3,1.5) P1_A10(4.5,1.5) P1_A11(2.7,1.5) P1_A12(0.9,1.5) P1_A13(-0.9,1.5) P1_A14(-2.7,1.5) P1_A15(-4.5,1.5) P1_A16(-6.3,1.5) P1_B1(20.7,2.85) P1_B2(18.9,2.85) P1_B3(17.1,2.85) P1_B4(15.3,2.85) P1_B5(13.5,2.85) P1_B6(11.7,2.85) P1_B7(9.9,2.85) P1_B8(8.1,2.85) P1_B9(6.3,2.85) P1_B10(4.5,2.85) P1_B11(2.7,2.85) P1_B12(0.9,2.85) P1_B13(-0.9,2.85) P1_B14(-2.7,2.85) P1_B15(-4.5,2.85) P1_B16(-6.3,2.85) P1_C1(20.7,4.2) P1_C2(18.9,4.2) P1_C3(17.1,4.2) P1_C4(15.3,4.2) P1_C5(13.5,4.2) P1_C6(11.7,4.2) P1_C7(9.9,4.2) P1_C8(8.1,4.2) P1_C9(6.3,4.2) P1_C10(4.5,4.2) P1_C11(2.7,4.2) P1_C12(0.9,4.2) P1_C13(-0.9,4.2) P1_C14(-2.7,4.2) P1_C15(-4.5,4.2) P1_C16(-6.3,4.2) P1_D1(20.7,5.55) P1_D2(18.9,5.55) P1_D3(17.1,5.55) P1_D4(15.3,5.55) P1_D5(13.5,5.55) P1_D6(11.7,5.55) P1_D7(9.9,5.55) P1_D8(8.1,5.55) P1_D9(6.3,5.55) P1_D10(4.5,5.55) P1_D11(2.7,5.55) P1_D12(0.9,5.55) P1_D13(-0.9,5.55) P1_D14(-2.7,5.55) P1_D15(-4.5,5.55) P1_D16(-6.3,5.55) P1_E1(20.7,6.9) P1_E2(18.9,6.9) P1_E3(17.1,6.9) P1_E4(15.3,6.9) P1_E5(13.5,6.9) P1_E6(11.7,6.9) P1_E7(9.9,6.9) P1_E8(8.1,6.9) P1_E9(6.3,6.9) P1_E10(4.5,6.9) P1_E11(2.7,6.9) P1_E12(0.9,6.9) P1_E13(-0.9,6.9) P1_E14(-2.7,6.9) P1_E15(-4.5,6.9) P1_E16(-6.3,6.9) P1_F1(20.7,8.25) P1_F2(18.9,8.25) P1_F3(17.1,8.25) P1_F4(15.3,8.25) P1_F5(13.5,8.25) P1_F6(11.7,8.25) P1_F7(9.9,8.25) P1_F8(8.1,8.25) P1_F9(6.3,8.25) P1_F10(4.5,8.25) P1_F11(2.7,8.25) P1_F12(0.9,8.25) P1_F13(-0.9,8.25) P1_F14(-2.7,8.25) P1_F15(-4.5,8.25) P1_F16(-6.3,8.25) P1_G1(20.7,9.6) P1_G2(18.9,9.6) P1_G3(17.1,9.6) P1_G4(15.3,9.6) P1_G5(13.5,9.6) P1_G6(11.7,9.6) P1_G7(9.9,9.6) P1_G8(8.1,9.6) P1_G9(6.3,9.6) P1_G10(4.5,9.6) P1_G11(2.7,9.6) P1_G12(0.9,9.6) P1_G13(-0.9,9.6) P1_G14(-2.7,9.6) P1_G15(-4.5,9.6) P1_G16(-6.3,9.6) P2_A1(-8.1,1.5) P2_A2(-9.9,1.5) P2_A3(-11.7,1.5) P2_A4(-13.5,1.5) P2_A5(-15.3,1.5) P2_A6(-17.1,1.5) P2_A7(-18.9,1.5) P2_A8(-20.7,1.5) P2_A9(-22.5,1.5) P2_A10(-24.3,1.5) P2_A11(-26.1,1.5) P2_A12(-27.9,1.5) P2_A13(-29.7,1.5) P2_A14(-31.5,1.5) P2_A15(-33.3,1.5) P2_A16(-35.1,1.5) P2_B1(-8.1,2.85) P2_B2(-9.9,2.85) P2_B3(-11.7,2.85) P2_B4(-13.5,2.85) P2_B5(-15.3,2.85) P2_B6(-17.1,2.85) P2_B7(-18.9,2.85) P2_B8(-20.7,2.85) P2_B9(-22.5,2.85) P2_B10(-24.3,2.85) P2_B11(-26.1,2.85) P2_B12(-27.9,2.85) P2_B13(-29.7,2.85) P2_B14(-31.5,2.85) P2_B15(-33.3,2.85) P2_B16(-35.1,2.85) P2_C1(-8.1,4.2) P2_C2(-9.9,4.2) P2_C3(-11.7,4.2) P2_C4(-13.5,4.2) P2_C5(-15.3,4.2) P2_C6(-17.1,4.2) P2_C7(-18.9,4.2) P2_C8(-20.7,4.2) P2_C9(-22.5,4.2) P2_C10(-24.3,4.2) P2_C11(-26.1,4.2) P2_C12(-27.9,4.2) P2_C13(-29.7,4.2) P2_C14(-31.5,4.2) P2_C15(-33.3,4.2) P2_C16(-35.1,4.2) P2_D1(-8.1,5.55) P2_D2(-9.9,5.55) P2_D3(-11.7,5.55) P2_D4(-13.5,5.55) P2_D5(-15.3,5.55) P2_D6(-17.1,5.55) P2_D7(-18.9,5.55) P2_D8(-20.7,5.55) P2_D9(-22.5,5.55) P2_D10(-24.3,5.55) P2_D11(-26.1,5.55) P2_D12(-27.9,5.55) P2_D13(-29.7,5.55) P2_D14(-31.5,5.55) P2_D15(-33.3,5.55) P2_D16(-35.1,5.55) P2_E1(-8.1,6.9) P2_E2(-9.9,6.9) P2_E3(-11.7,6.9) P2_E4(-13.5,6.9) P2_E5(-15.3,6.9) P2_E6(-17.1,6.9) P2_E7(-18.9,6.9) P2_E8(-20.7,6.9) P2_E9(-22.5,6.9) P2_E10(-24.3,6.9) P2_E11(-26.1,6.9) P2_E12(-27.9,6.9) P2_E13(-29.7,6.9) P2_E14(-31.5,6.9) P2_E15(-33.3,6.9) P2_E16(-35.1,6.9) P2_F1(-8.1,8.25) P2_F2(-9.9,8.25) P2_F3(-11.7,8.25) P2_F4(-13.5,8.25) P2_F5(-15.3,8.25) P2_F6(-17.1,8.25) P2_F7(-18.9,8.25) P2_F8(-20.7,8.25) P2_F9(-22.5,8.25) P2_F10(-24.3,8.25) P2_F11(-26.1,8.25) P2_F12(-27.9,8.25) P2_F13(-29.7,8.25) P2_F14(-31.5,8.25) P2_F15(-33.3,8.25) P2_F16(-35.1,8.25) P2_G1(-8.1,9.6) P2_G2(-9.9,9.6) P2_G3(-11.7,9.6) P2_G4(-13.5,9.6) P2_G5(-15.3,9.6) P2_G6(-17.1,9.6) P2_G7(-18.9,9.6) P2_G8(-20.7,9.6) P2_G9(-22.5,9.6) P2_G10(-24.3,9.6) P2_G11(-26.1,9.6) P2_G12(-27.9,9.6) P2_G13(-29.7,9.6) P2_G14(-31.5,9.6) P2_G15(-33.3,9.6) P2_G16(-35.1,9.6)
  round 4.65 hole 4.65: ""(-42.35,4.75) ""(42.35,4.75)
  round 3 hole 3: ""(-42.35,10.25) ""(42.35,10.25)
  round 0.6 hole 0.6: ""(-29.7,10.85) ""(-22.5,10.85) ""(-15.3,10.85) ""(-8.1,10.85) ""(-0.9,10.85) ""(6.3,10.85) ""(13.5,10.85) ""(20.7,10.85) ""(27.9,10.85) ""(35.1,10.85)
  silkscreen extent -35.94,0 37.74,11.81

## Part data
J1 J2: library part 6678_CORE
J3 J6: library part JTAG14_DSP
C1 C2 C3 C4 C5 C6 C7 C8 C9 C10 C11 C12 C13 C14 C15 C16 C17 C18 C19 C20 C21 C22 C23 C24 C25 C26 C27 C28 C29 C30 C31 C32 C33 C34 C35 C36: 型号=0.1uF/50V
J7: 型号=**VPX4-H

## Free pads (board coordinates)
  round 196.85 hole 110.24: 0(0,-3500) 0(0,0)

## Via types
v1: diameter 24, hole 12, TOP to BOTTOM, tented both sides, 833 vias
v2: diameter 24, hole 12, TOP to BOTTOM, 200 vias

## Nets (pads, with @x,y where several pads share a name; then routed paths per layer and width w, separated by ;. In a path a pad name is that pad's centre, name@x,y a point inside that pad or via, vN(x,y) a via of type N, cw(c..) or ccw(c..) an arc to the next point about the centre after c; other vN are vias at no path point)
6208_CLK: J1.B1_30 J7.P0_F5 | length 4743
  TOP w4.5: v2(1630.41,-275.08) 1630.41,-340.49 J1.B1_30@1630.51,-340.59
  S04 w4.5: v2(1630.41,-275.08) 1630.41,-151.25 1802.66,21 4748,21 5387.87,-618.87 5766.82,-618.87 5767.06,-618.62 5794.36,-618.62 5794.6,-618.87 5801.15,-618.87 J7.P0_F5@5833.86,-651.57
6208_CS: J1.B1_29 J7.P0_G4 | length 4828.3
  TOP w4.5: v2(1606.99,-406.1) J1.B1_29@1606.99,-340.69
  S04 w4.5: v2(1606.99,-406.1) 1606.99,-151.54 1606.89,-151.44 1795.83,37.5 4756.5,37.5 5374.71,-580.71 J7.P0_G4@5780.71,-580.71
6208_EN: J1.A1_33 J7.P1_B1 | length 4946.1
  TOP w4.5: v2(1701.47,-641) J1.A1_33@1701.47,-565.09
  S03 w4.5: v2(1701.47,-641) 1678.22,-664.25 1678.22,-914.1 1953.37,-1189.25 4703.75,-1189.25 4924,-969 6012.5,-969 J7.P1_B1@6046.46,-935.04
6208_IO0: J1.A1_29 J7.P1_B5 | length 5024.7
  TOP w4.5: v2(1606.89,-640.91) J1.A1_29@1606.89,-565
  S03 w4.5: v2(1606.89,-640.91) 1583.64,-664.16 1583.64,-953.28 1914.19,-1283.83 4830.81,-1283.83 4863.19,-1251.45 6013.51,-1251.45 J7.P1_B5@6046.46,-1218.5
6208_RST: J1.B1_32 J7.P0_G6 | length 4644.7
  TOP w4.5: v2(1677.65,-275.08) 1677.65,-340.49 J1.B1_32@1677.76,-340.59
  S04 w4.5: v2(1677.65,-275.08) 1677.65,-150.68 1816.33,-12 4720,-12 5430,-722 5780.27,-722 J7.P0_G6@5780.71,-722.44
6208_SDI: J1.A1_30 J7.P1_C4 | length 4953
  TOP w4.5: v2(1606.89,-692.91) 1630.42,-669.38 J1.A1_30@1630.42,-564.91
  S03 w4.5: v2(1606.89,-692.91) 1606.89,-943.65 1923.82,-1260.58 4789.42,-1260.58 4866,-1184 5956.94,-1184 J7.P1_C4@5993.31,-1147.64
6208_SDO: J1.A1_31 J7.P1_B3 | length 4985.6
  TOP w4.5: v2(1654.13,-640.91) J1.A1_31@1654.13,-565
  S03 w4.5: v2(1654.13,-640.91) 1630.88,-664.16 1630.88,-933.71 1933.76,-1236.59 4759.41,-1236.59 4886.28,-1109.72 6013.51,-1109.72 J7.P1_B3@6046.46,-1076.77
62082_CLK2: J2.B1_30 J7.P1_F2 | length 2199.2
  TOP w4.5: v2(4174.94,-275.08) 4174.94,-340.49 J2.B1_30@4175.04,-340.59
  S04 w4.5: v2(4174.94,-275.08) 4174.94,-205.06 4263,-117 4673,-117 5528,-972 5799.95,-972 J7.P1_F2@5833.86,-1005.9
62082_CS: J2.B1_29 J7.P1_E1 | length 2404.3
  TOP w4.5: v2(4151.52,-406.1) J2.B1_29@4151.52,-340.69
  S04 w4.5: v2(4151.52,-406.1) 4151.52,-191.48 4249,-94 4680.67,-94 5488.67,-902 5853.97,-902 J7.P1_E1@5887.01,-935.04
62082_EN: J2.A1_33 J7.P0_B6 | length 2066.6
  TOP w4.5: J2.A1_33@4245.91,-565 4246,-565.09 v2(4246,-641) ; v2(5176,-861) 5276.65,-760.35 6008.54,-760.35 J7.P0_B6@6046.46,-722.44
  S04 w4.5: v2(4246,-641) 4246,-621 4262,-605 4691.46,-605 4947.46,-861 v2(5176,-861)
62082_IO0: J2.A1_29 J7.P0_B4 | length 2209
  TOP w4.5: J2.A1_29@4151.32,-564.91 J2.A1_29@4151.42,-565 v2(4151.42,-640.91) ; v2(5116,-788) 5285.38,-618.62 6008.54,-618.62 J7.P0_B4@6046.46,-580.71
  S04 w4.5: v2(4151.42,-640.91) 4151.42,-609.58 4208,-553 4713,-553 4948,-788 v2(5116,-788)
62082_RST: J2.B1_32 J7.P1_F4 | length 2160.3
  TOP w4.5: v2(4222.18,-275.08) 4222.18,-340.49 J2.B1_32@4222.28,-340.59
  S04 w4.5: v2(4222.18,-275.08) 4222.18,-228.82 4290,-161 4662,-161 5613,-1112 5798.22,-1112 J7.P1_F4@5833.86,-1147.64
62082_SDI: J2.A1_30 J7.P0_D6 | length 2299.8
  TOP w4.5: v2(4151.42,-692.91) 4174.94,-669.38 J2.A1_30@4174.94,-564.91
  S03 w4.5: v2(4151.42,-692.91) 4151.42,-879 4289,-1016.58 4662.18,-1016.58 4918.89,-759.87 5917,-759.87 5933.86,-743 5933.86,-728.73 J7.P0_D6@5940.16,-722.44
62082_SDO: J2.A1_31 J7.P0_B5 | length 2143.7
  TOP w4.5: J2.A1_31@4198.57,-564.91 J2.A1_31@4198.66,-565 v2(4198.66,-640.91) ; v2(5164,-792) 5266.51,-689.49 6008.54,-689.49 J7.P0_B5@6046.46,-651.57
  S04 w4.5: v2(4198.66,-640.91) 4198.66,-614.34 4235,-578 4702.64,-578 4954.64,-830 5126,-830 v2(5164,-792)
+1.8V_FP: J1.A2_4 J3.5 | length 2696.8
  TOP w4.5: v2(1016.34,-3232.47) J1.A2_4@1016.34,-3163.43
  S03 w4.5: J3.5@174.4,-1235.04 655.04,-1235.04 746,-1326 746,-2933 1016.34,-3203.34 v2(1016.34,-3232.47)
+1.8V_FP2: J2.A2_4 J6.5 | length 4359.3
  TOP w4.5: J6.5@174.4,-2464.96 235,-2525.56 235,-3230 398,-3393 3469,-3393 3560.87,-3301.13 J2.A2_4@3560.87,-3163.43
BOOT2_MODE_00: J2.B2_40 J7.P2_E13 | length 1705.8
  TOP w4.5: J2.B2_40@4411.26,-2939.02 4411.26,-2837.74 4493,-2756 5464,-2756 5660.24,-2952.24 5854.06,-2952.24 J7.P2_E13@5887.01,-2919.29
BOOT2_MODE_01: J2.B2_39 J7.P2_F12 | length 1680.9
  TOP w4.5: J2.B2_39@4387.64,-2939.02 4387.64,-2827.36 4492,-2723 5477,-2723 5636,-2882 5800.28,-2882 J7.P2_F12@5833.86,-2848.42
BOOT2_MODE_02: J2.B2_37 J7.P2_F10 | length 1744.4
  TOP w4.5: J2.B2_37@4340.39,-2939.02 4340.39,-2797.61 4477,-2661 5529,-2661 5607.64,-2739.64 5812.36,-2739.64 5827.56,-2724.44 5827.56,-2712.99 J7.P2_F10@5833.86,-2706.69
BOOT2_MODE_03: J2.B2_28 J7.P2_D9 | length 2185.7
  TOP w4.5: v2(4104.17,-2811.34) 4127.46,-2834.62 J2.B2_28@4127.46,-2939.35
  BOTTOM w4.5: v2(4104.17,-2811.34) 4104.17,-2677.83 4187,-2595 5407,-2595 5480.78,-2668.78 5907.21,-2668.78 J7.P2_D9@5940.16,-2635.83
BOOT2_MODE_04: J2.B2_32 J7.P2_D13 | length 2035
  TOP w4.5: v2(4199,-2811) 4222.28,-2834.28 J2.B2_32@4222.28,-2939.02
  BOTTOM w4.5: v2(4199,-2811) 4199,-2770 4229,-2740 5292,-2740 5505.73,-2953.73 5905.72,-2953.73 J7.P2_D13@5940.16,-2919.29
BOOT2_MODE_05: J2.B2_36 J7.P2_E9 | length 1825.9
  TOP w4.5: J2.B2_36@4316.77,-2939.02 4316.77,-2772.23 4457.11,-2631.89 5554.89,-2631.89 5594,-2671 5851.83,-2671 J7.P2_E9@5887.01,-2635.83
BOOT2_MODE_06: J2.B2_30 J7.P2_D11 | length 2125.2
  TOP w4.5: v2(4151.42,-2811.34) 4174.7,-2834.62 J2.B2_30@4174.7,-2939.35
  BOTTOM w4.5: v2(4151.42,-2811.34) 4151.42,-2706.58 4195,-2663 5339,-2663 5488,-2812 5905.72,-2812 J7.P2_D11@5940.16,-2777.56
BOOT2_MODE_07: J2.B2_38 J7.P2_E11 | length 1759
  TOP w4.5: J2.B2_38@4364.02,-2939.02 4364.02,-2814.98 4485,-2694 5503,-2694 5619.51,-2810.51 5854.06,-2810.51 J7.P2_E11@5887.01,-2777.56
BOOT2_MODE_08: J2.B2_33 J7.P2_F6 | length 1940.6
  TOP w4.5: J2.B2_33@4245.91,-2939.02 4245.91,-2701.68 4491.41,-2456.18 5800.91,-2456.18 J7.P2_F6@5833.86,-2423.23
BOOT2_MODE_09: J2.B2_34 J7.P2_E7 | length 1925.7
  TOP w4.5: J2.B2_34@4269.53,-2939.02 4269.53,-2727.47 4469.96,-2527.04 5854.06,-2527.04 J7.P2_E7@5887.01,-2494.09
BOOT2_MODE_10: J2.B2_35 J7.P2_F8 | length 1807
  TOP w4.5: J2.B2_35@4293.15,-2939.02 4293.15,-2748.85 4444.09,-2597.91 5800.91,-2597.91 J7.P2_F8@5833.86,-2564.96
BOOT2_MODE_11: J2.B2_31 J7.P2_E12 | length 2024.1
  TOP w4.5: J2.B2_31@4198.66,-2939.02 4199,-2938.68 v2(4199,-2867)
  BOTTOM w4.5: v2(4199,-2867) 4175.75,-2843.75 4175.75,-2737.25 4208,-2705 5324,-2705 5501.87,-2882.87 5852.57,-2882.87 J7.P2_E12@5887.01,-2848.42
BOOT2_MODE_12: J2.B2_26 J7.P2_E8 | length 2160.5
  TOP w4.5: J2.B2_26@4080.38,-2939.19 J2.B2_26@4080.55,-2939.02 4080.72,-2938.85 v2(4080.72,-2867.17)
  BOTTOM w4.5: v2(4080.72,-2867.17) 4080.72,-2651.28 4170.83,-2561.17 4602,-2561.17 5425.12,-2561.17 5461.86,-2597.91 5854.06,-2597.91 J7.P2_E8@5887.01,-2564.96
BOOT2_MODE_13: J2.B2_29 J7.P2_E10 | length 2100
  TOP w4.5: J2.B2_29@4151.08,-2939.35 J2.B2_29@4151.42,-2939.02 v2(4151.42,-2867.34)
  BOTTOM w4.5: v2(4151.42,-2867.34) 4128.17,-2844.09 4128.17,-2691.83 4189,-2631 5382,-2631 5490.64,-2739.64 5854.06,-2739.64 J7.P2_E10@5887.01,-2706.69
BOOT_MODE_00: J1.B2_40 J7.P2_B13 | length 4528.2
  TOP w4.5: v2(1843.45,-2811) 1866.73,-2834.28 J1.B2_40@1866.73,-2939.02
  S03 w4.5: v2(1843.45,-2811) 1843.45,-2772.55 1950,-2666 4566,-2666 4783.33,-2883.33 4861,-2883.33 6010.5,-2883.33 J7.P2_B13@6046.46,-2919.29
BOOT_MODE_01: J1.B2_39 J7.P2_C12 | length 4494.4
  TOP w4.5: J1.B2_39@1843.11,-2939.02 1843.45,-2938.68 v2(1843.45,-2867)
  S03 w4.5: v2(1843.45,-2867) 1820,-2843.55 1820,-2762.84 1940.29,-2642.55 4574,-2642.55 4592.55,-2642.55 4762.46,-2812.46 4810,-2812.46 5957.35,-2812.46 J7.P2_C12@5993.31,-2848.42
BOOT_MODE_02: J1.B2_37 J7.P2_C10 | length 4533.6
  TOP w4.5: J1.B2_37@1795.87,-2939.02 1796.2,-2938.68 v2(1796.2,-2867)
  S03 w4.5: v2(1796.2,-2867) 1772.76,-2843.55 1772.76,-2743.27 1920.72,-2595.31 4623.31,-2595.31 4698.73,-2670.73 5957.35,-2670.73 J7.P2_C10@5993.31,-2706.69
BOOT_MODE_03: J1.B2_28 J7.P2_B12 | length 4763
  TOP w4.5: v2(1559.98,-2811) 1583.27,-2834.28 J1.B2_28@1583.27,-2939.02
  S04 w4.5: v2(1559.98,-2811) 1559.98,-2760.2 1622.19,-2698 5296,-2698 5411.33,-2813.33 6011.36,-2813.33 J7.P2_B12@6046.46,-2848.42
BOOT_MODE_04: J1.B2_32 J7.P1_C8 | length 5177
  TOP w4.5: v2(1654.47,-2811) 1677.76,-2834.28 J1.B2_32@1677.76,-2939.02 ; v2(5654,-1501) 5654,-1453 5715,-1392 5954.21,-1392 J7.P1_C8@5993.31,-1431.1
  S03 w4.5: v2(1654.47,-2811) 1654.47,-2694.27 1871.72,-2477.02 3954.98,-2477.02 4901,-1531 5624,-1531 v2(5654,-1501)
BOOT_MODE_05: J1.B2_36 J7.P2_B9 | length 4609.4
  TOP w4.5: v2(1748.96,-2811) 1772.24,-2834.28 J1.B2_36@1772.24,-2939.02
  S03 w4.5: v2(1748.96,-2811) 1748.96,-2733.41 1910.86,-2571.51 4574,-2571.51 4577.51,-2568 4641,-2568 4672.87,-2599.87 4704,-2599.87 6010.5,-2599.87 J7.P2_B9@6046.46,-2635.83
BOOT_MODE_06: J1.B2_30 J7.P1_F8 | length 5033.3
  TOP w4.5: v2(1607.23,-2811) 1630.51,-2834.28 J1.B2_30@1630.51,-2939.02
  S03 w4.5: v2(1607.23,-2811) 1607.23,-2669.77 1849,-2428 3841,-2428 4802.47,-1466.53 5823.47,-1466.53 5833.45,-1456.55 5833.45,-1431.51 J7.P1_F8@5833.86,-1431.1
BOOT_MODE_07: J1.B2_38 J7.P2_B11 | length 4567.3
  TOP w4.5: v2(1796.2,-2811) 1819.49,-2834.28 J1.B2_38@1819.49,-2939.02
  S03 w4.5: v2(1796.2,-2811) 1796.2,-2752.98 1930.43,-2618.76 4574,-2618.76 4603.76,-2618.76 4726.6,-2741.6 6010.5,-2741.6 J7.P2_B11@6046.46,-2777.56
BOOT_MODE_08: J1.B2_33 J7.P2_B6 | length 4756.6
  TOP w4.5: J1.B2_33@1701.38,-2939.02 1701.72,-2938.68 v2(1701.72,-2867)
  S03 w4.5: v2(1701.72,-2867) 1678.27,-2843.55 1678.27,-2704.13 1881.58,-2500.82 4574,-2500.82 4684.54,-2390.28 4927,-2390.28 6013.51,-2390.28 J7.P2_B6@6046.46,-2423.23
BOOT_MODE_09: J1.B2_34 J7.P2_B7 | length 4697.9
  TOP w4.5: v2(1701.72,-2811) 1725,-2834.28 J1.B2_34@1725,-2939.02
  S03 w4.5: v2(1701.72,-2811) 1701.72,-2713.84 1891.29,-2524.27 4574,-2524.27 4637.12,-2461.14 4927,-2461.14 6013.51,-2461.14 J7.P2_B7@6046.46,-2494.09
BOOT_MODE_10: J1.B2_35 J7.P2_C8 | length 4588.5
  TOP w4.5: J1.B2_35@1748.62,-2939.02 1748.96,-2938.68 v2(1748.96,-2867)
  S03 w4.5: v2(1748.96,-2867) 1725.51,-2843.55 1725.51,-2723.7 1901.15,-2548.06 4574,-2548.06 4593.06,-2529 4704,-2529 5957.35,-2529 J7.P2_C8@5993.31,-2564.96
BOOT_MODE_11: J1.B2_31 J7.P1_B7 | length 5318.9
  TOP w4.5: J1.B2_31@1654.13,-2939.02 1654.47,-2938.68 v2(1654.47,-2867) ; v2(5587,-1502) 5587,-1394 5653.72,-1327.28 6013.51,-1327.28 J7.P1_B7@6046.46,-1360.23
  S03 w4.5: v2(1654.47,-2867) 1631.02,-2843.55 1631.02,-2684.56 1862.01,-2453.57 3899.43,-2453.57 4851,-1502 v2(5587,-1502)
BOOT_MODE_12: J1.B2_26 J7.P2_A11 | length 4831.9
  TOP w4.5: J1.B2_26@1536.36,-2938.68 v2(1536.36,-2867)
  S04 w4.5: v2(1536.36,-2867) 1536.36,-2750.42 1619.78,-2667 5323,-2667 5398.46,-2742.46 6064.51,-2742.46 J7.P2_A11@6099.61,-2777.56
BOOT_MODE_13: J1.B2_29 J7.P1_E7 | length 5130.8
  TOP w4.5: J1.B2_29@1606.89,-2939.02 1607.23,-2938.68 v2(1607.23,-2867)
  S03 w4.5: v2(1607.23,-2867) 1583.98,-2843.75 1583.98,-2659.02 1840,-2403 3808,-2403 4817.81,-1393.19 5854.06,-1393.19 J7.P1_E7@5887.01,-1360.23